# Altium PCB panel_pcb.PcbDoc
Units mm, origin at the board's own origin, x right, y up, seen from the top; angles counter-clockwise.
Board outline 60 x 40 mm, 2 copper layers (Top Layer, Bottom Layer); 9 components, 14 nets, 48 pads, 0 vias.
Unrouted connection lines stored in the file: 32.
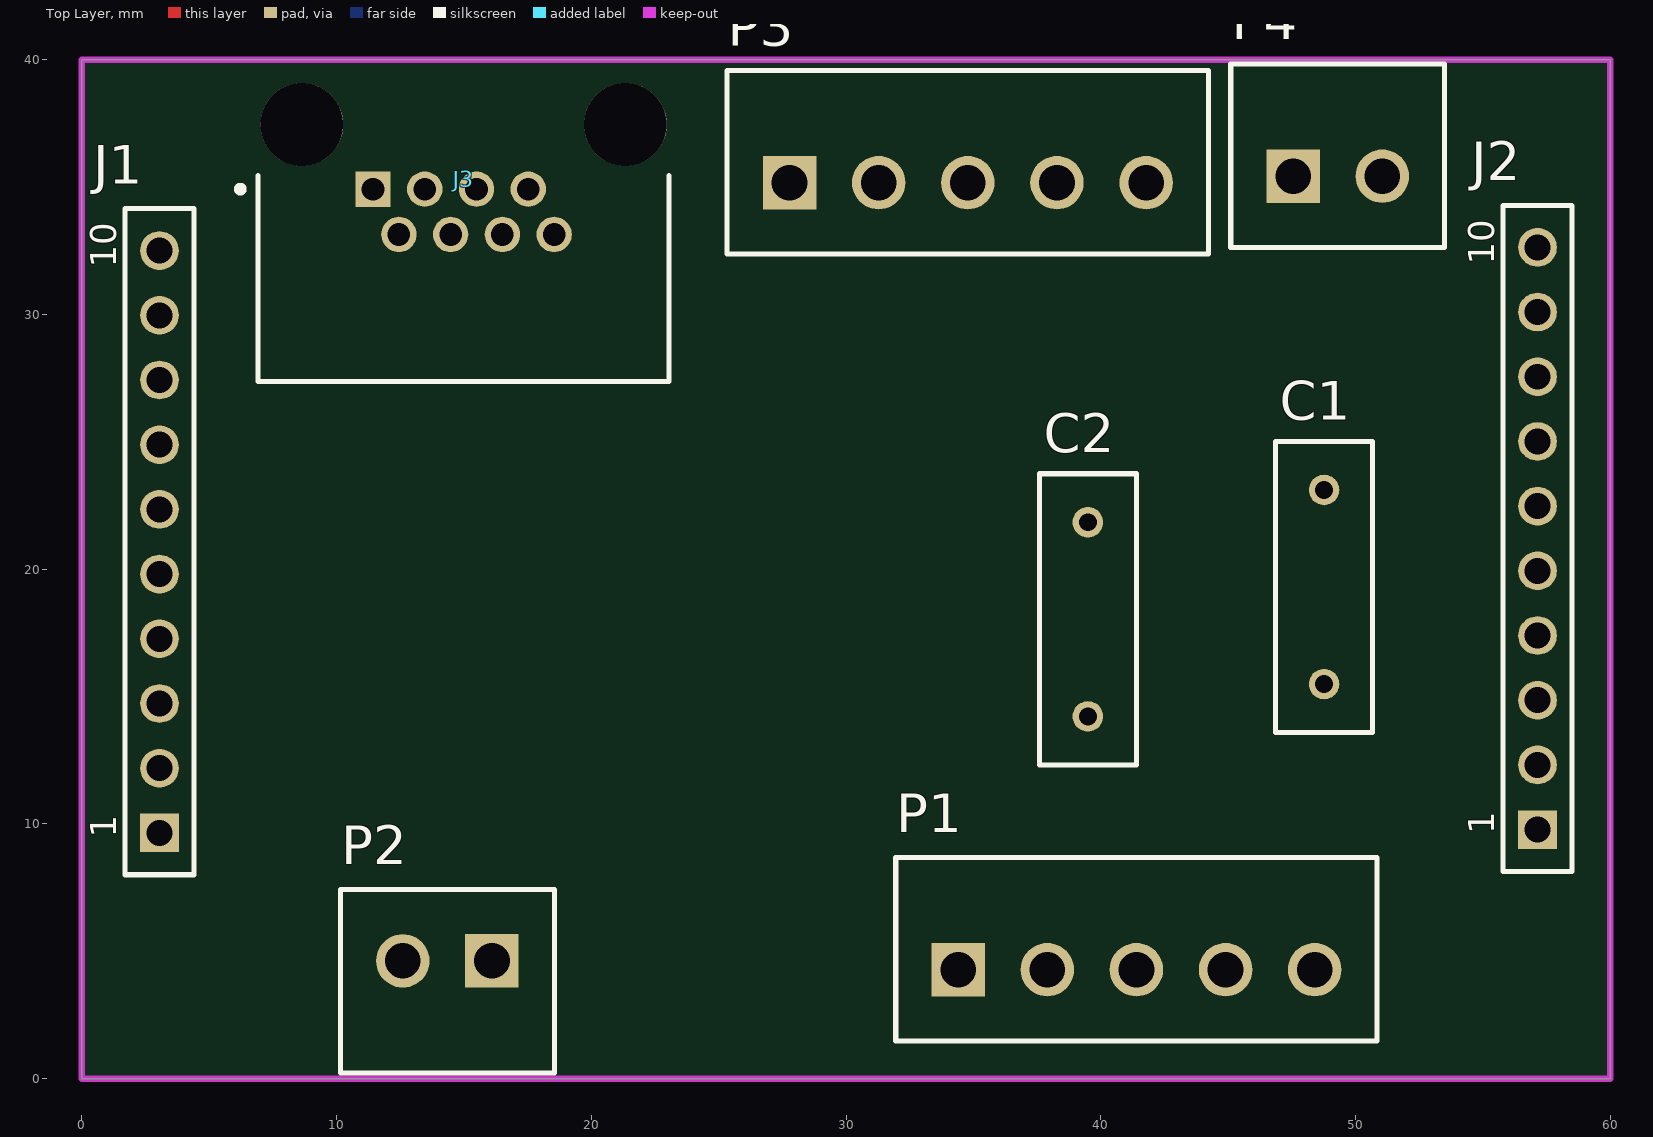
[diagram p0: Top Layer view]
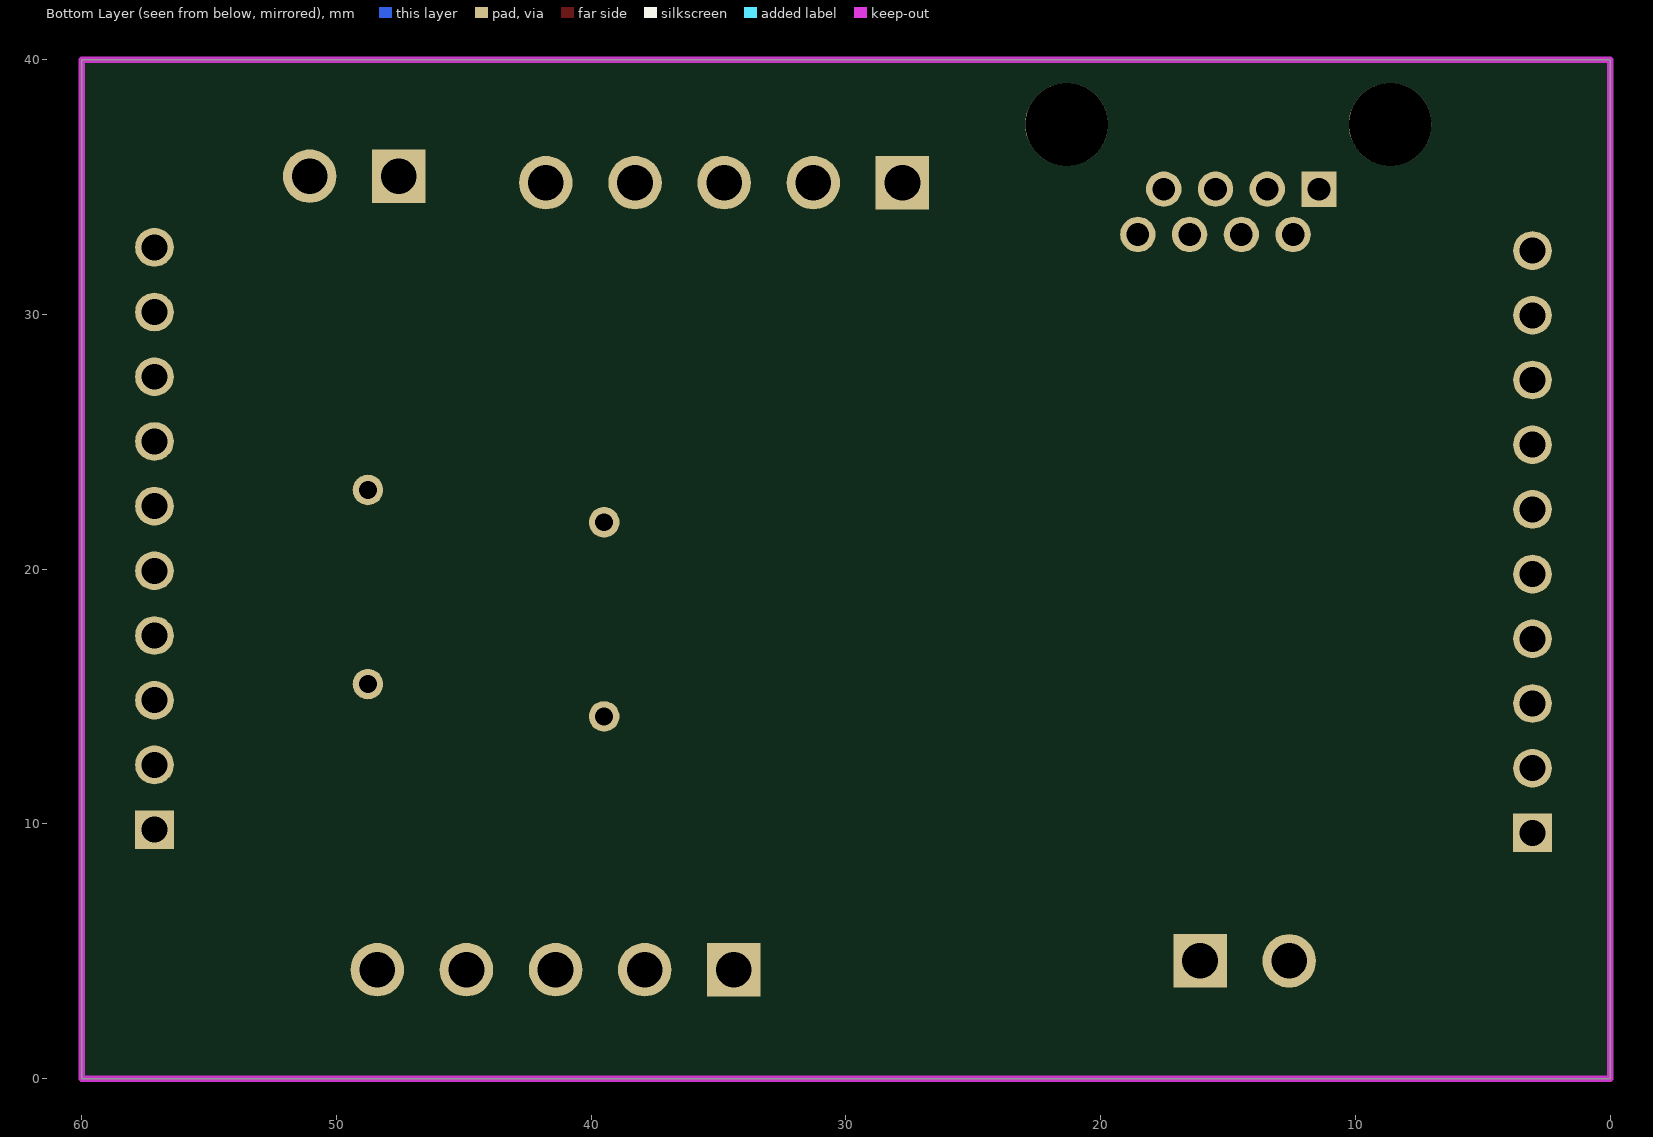
[diagram p1: Bottom Layer view, seen from below]

## Layer stack, top to bottom
Top Solder: solder mask 0.0102, Solder Resist, Dk 3.5
Top Layer: signal copper 0.0356
Dielectric 1: dielectric 0.32, FR-4, Dk 4.8
Bottom Layer: signal copper 0.0356
Bottom Solder: solder mask 0.0102, Solder Resist, Dk 3.5

## Board outline
0,0 60,0 60,40 0,40

## Design rules (kind name [scope] priority, off if disabled: settings)
Clearance [All] p1: gap=0.254 ignorepadtopadclearanceinfootprint=FALSE except(0: Arc-Hole Track-Hole SMDPad-Hole THPad-Hole Via-Hole Fill-Hole Poly-Hole Region-Hole Text-Hole)
PolygonConnect [All] p1: connectstyle=Relief reliefconductorwidth=0.254 reliefentries=4 polygonreliefangle="90 Angle" airgapwidth=0.254
RoutingVias [All] p1: holewidth=0.711 width=1.27 viastyle="Through Hole" minholewidth=0.711 minwidth=1.27 maxholewidth=0.711 maxwidth=1.27
SolderMaskExpansion [All] p1: expansion=0.102 istentingtop=FALSE
Width [All] p1: maxlimit=0.254 minlimit=0.254 preferedwidth=0.254
30 further rules are at their usual default settings.

## Components (designator, comment, footprint, x,y, rotation, side; value= is the part's Value field where it differs from the comment)
C1 "Cap" RAD-0.3 48.768,19.304 r90 top value=100nF
C2 "Cap" RAD-0.3 39.497,18.034 r90 top value=100nF
J1 "61301011821" 61301011821 3.048,21.082 r90 top
J2 "61301011821" 61301011821 57.15,21.209 r90 top
J3 "RJHSE-5080" FP-RJHSE-5080-MFG 14.986,35.052 r180 top
P1 "691321100005" 691321100005 41.402,5.08 r0 top
P2 "691321100002" 691321100002 14.351,3.825 r180 top
P3 "691321100005" 691321100005 34.783,35.979 r0 top
P4 "691321100002" 691321100002 49.304,36.233 r0 top

## Footprints (in the part's own frame and the unit in brackets; to place one, negate y for a bottom-side part, rotate by r counter-clockwise, add the part's x,y. Pads: shape width x height; smd on the part's side, far side on the other; paste and mask are expansions set on the pad)
61301011821 [mm] "Socket Header, Pitch 2.54 mm, THT, Vertical, single row, 10p"
  rect 1.52x1.52 hole 1.02: 1(-11.43,0)
  round 1.52 hole 1.02: 2(-8.89,0) 3(-6.35,0) 4(-3.81,0) 5(-1.27,0) 6(1.27,0) 7(3.81,0) 8(6.35,0) 9(8.89,0) 10(11.43,0)
  silkscreen extent -13.08,-1.35 13.08,1.35, body extent -12.95,-1.25 12.95,1.25, height 8.55
691321100002 [mm] "Vertical PCB Header, pitch 3.5mm, 02p"
  rect 2.1x2.1 hole 1.4: 1(-1.75,-0.8)
  round 2.1 hole 1.4: 2(1.75,-0.8)
  silkscreen extent -4.2,-3.6 4.2,3.6, body extent -4.2,-3.6 4.2,3.6, height 9.3
691321100005 [mm] "Vertical PCB Header, pitch 3.5mm, 05p"
  rect 2.1x2.1 hole 1.4: 1(-7,-0.8)
  round 2.1 hole 1.4: 2(-3.5,-0.8) 3(0,-0.8) 4(3.5,-0.8) 5(7,-0.8)
  silkscreen extent -9.45,-3.6 9.45,3.6, body extent -9.45,-3.6 9.45,3.6, height 9.3
FP-RJHSE-5080-MFG [mm]
  rect 1.39x1.39 hole 0.89 paste-1000 mask+0: 1(3.556,0.127)
  round 1.39 hole 0.89 paste-1000 mask+0: 2(2.54,1.905) 3(1.524,0.127) 4(0.508,1.905) 5(-0.508,0.127) 6(-1.524,1.905) 7(-2.54,0.127) 8(-3.556,1.905)
  round 3.25 hole 3.25 unplated paste-1000 mask+0: ""(-6.35,-2.413) ""(6.35,-2.413)
  silkscreen extent -8.06,-0.41 8.89,7.68, body extent -8.16,-7.78 8.16,7.78, height 0.25
RAD-0.3 [mm] "Radial Cap, Thru-Hole; 2 Leads; 0.3 in Pin Spacing"
  round 1.2 hole 0.7: 1(-3.81,0) 2(3.81,0)
  silkscreen extent -5.71,-1.91 5.71,1.91

## Part data
C1 C2: "Capacitor", LatestRevisionDate=17-Jul-2002, LatestRevisionNote="Re-released for DXP Platform.", PackageDescription="Radial Cap, Thru-Hole; 2 Leads; 0.3 in Pin Spacing", PackageReference=RAD-0.3, Published=8-Jun-2000, Publisher="Altium Limited"
J1 J2: library part CMP-1502-01332-1, "THT Vertical Socket Header WR-PHD, Pitch 2.54 mm, Single Row, 10 pins", Contact Resistance=20mOhm, Manufacturer="Wurth Elektronik", Operating Temperature=-40to125degC, Rated Current=3A, Withstanding Voltage=500VAC, Working Voltage=250VAC, Datasheet URL=https://katalog.we-online.de/em/datasheet/6130xx11821.pdf, Gender=Female, Manufacturer URL=http://www.we-online.de, Mounting Technology=THT, Orientation=Vertical, Package Reference=61301011821, Packaging=Tray, Part Number=61301011821, Pin Number=10, Pitch=2.54mm, Publisher=WurthElektronik, Row Number=Single
J3: library part CMP-02366-000003-1, "CONN MOD JACK 8P8C R/A UNSHLD", Current Rating=1.5A, Manufacturer=Amphenol, Package=CONN_MOD_JACK, Temperature="-55°C to +85°C", Temperature Range High=+85°C, Temperature Range Low=-55°C, Voltage Rating=125V, Automotive=No, Category=Conn, ComponentLink2Description=Datasheet, ComponentLink2URL=https://cdn.amphenol-icc.com/media/wysiwyg/files/documentation/datasheet/inputoutput/io-modjack-rjhse.pdf, Conn Gender=Female, Conn Orientation="Right Angle", Contact Material=Gold,Nickel, Device Class L1=Connectors, Device Class L2="Modular / Ethernet Connectors", Device Class L3=unset, Digikey Description="CONN MOD JACK 8P8C R/A UNSHLD", Footprint Url=https://cdn.amphenol-icc.com/media/wysiwyg/files/drawing/rjhse5080.pdf?__cf_chl_jschl_tk__=e349db0bbbb6188a39347cd5e541b92fa02c9719-1587748343-0-AW7tChdeHzRPLX9gSWj7WrKaXQoY9BsmT9Ek0h-T62M9y3Rs9iypFcOtkzb-6sGYQEjFE-jcoNciDETCOZrh1rYyOesac5SvYLoLwHIsHvF4AKBlx-MXmfZUVk9OTTJLqyQq2qMm0PFRLJpNcK0nrKResqOniRSYixG2sPTmOPraH-ULJFBDL602CHqcI9KKBgTq90Jh1OL2Td4moJ99rFsJRJ1Tk_uoxGe8ublcP_ARu-uLpWcQrBcwOcHDTAwL29DAwVaqcH7ta8Ks7WMlHmVl_pILeEDwT0bE9vu5Pa5S3PtNRF1leuFkgi_FMbUxTDulc5xzbXSfng8srUIV1lWXny5nx1fZJEUa_w97yKjffzBMxiWLWVN-V7-uqAaPbyv_m-wRyw5O25OZNyJOeGU, Height=0.535inch, Is Female=yes, Lead Free=Yes, Manufacturer Part Number=RJHSE-5080, Mouser Description="Modular Connectors / Ethernet Connectors R/A RJ45 NONSHIELDED 8 CONT NO LEDS", Number Of Contacts=8, Octopart=https://octopart.com/rjhse-5080-amphenol-45060, Pitch=1.02mm, RoHS=TRUE
P1 P3: library part CMP-1502-01786-1, "Serie 3211 - 3.50mm Vertical PCB Header WR-TBL, 5 pin", Manufacturer="Wurth Elektronik", Operating Temperature=-40to105degC, Datasheet URL=http://katalog.we-online.de/em/datasheet/6913211000xx.pdf, Gender=Male, Manufacturer URL=http://www.we-online.de, Mounting Technology=THT, Package Reference=691321100005, Packaging=Box, Part Number=691321100005, Pin Number=5, Pitch=3.50mm, Publisher=WurthElektronik
P2 P4: library part CMP-1502-01783-1, "Serie 3211 - 3.50mm Vertical PCB Header WR-TBL, 2 pin", Manufacturer="Wurth Elektronik", Operating Temperature=-40to105degC, Datasheet URL=http://katalog.we-online.de/em/datasheet/6913211000xx.pdf, Gender=Male, Manufacturer URL=http://www.we-online.de, Mounting Technology=THT, Package Reference=691321100002, Packaging=Box, Part Number=691321100002, Pin Number=2, Pitch=3.50mm, Publisher=WurthElektronik

## Nets (pads, with @x,y where several pads share a name; then routed paths per layer and width w, separated by ;. In a path a pad name is that pad's centre, name@x,y a point inside that pad or via, vN(x,y) a via of type N, cw(c..) or ccw(c..) an arc to the next point about the centre after c; other vN are vias at no path point)
+5: J1.2 J2.2 P1.2 P2.2 P3.2 P4.2
CS_DIS: J1.6 J2.6 J3.4
CS_SD: J1.5 J2.5 J3.5
DC_DIS: J1.4 J2.4 J3.6
GND: C1.1 C2.1 J1.1 J2.1 P1.1 P3.1
MISO: J1.9 J2.9 J3.1
MOSI: J1.7 J2.7 J3.3
RESET_DIS: J1.3 J2.3 J3.7
SCK: J1.8 J2.8 J3.2
SET: P1.4 P3.4
START: P1.5 P3.5
STOP: P1.3 P3.3
T_pan: J3.8 P2.1
VCC: C1.2 C2.2 J1.10 J2.10 P4.1
pads on no net: J3.

## Keep-outs
Keep-Out Layer:
  the board outline again, w0.254

## Text inside footprints (layer, text, board x,y; h text height)
J1: Top Overlay "1" at 1.348,9.462 h1.02 r90; Top Overlay "10" at 1.348,31.832 h1.02 r90
J2: Top Overlay "1" at 55.45,9.589 h1.02 r90; Top Overlay "10" at 55.45,31.959 h1.02 r90